# Altium PCB ADCS C2Sv0.1.PcbDoc (part 2 of 3)
Units mm, origin at the board's own origin, x right, y up, seen from the top; angles counter-clockwise.
Board outline 90 x 68 mm, 6 copper layers (SIG 1, GND 1, SIG 2, PWR, GND 2, SIG 3), stack 1.597 mm thick; 158 components, 104 nets, 588 pads, 339 vias.
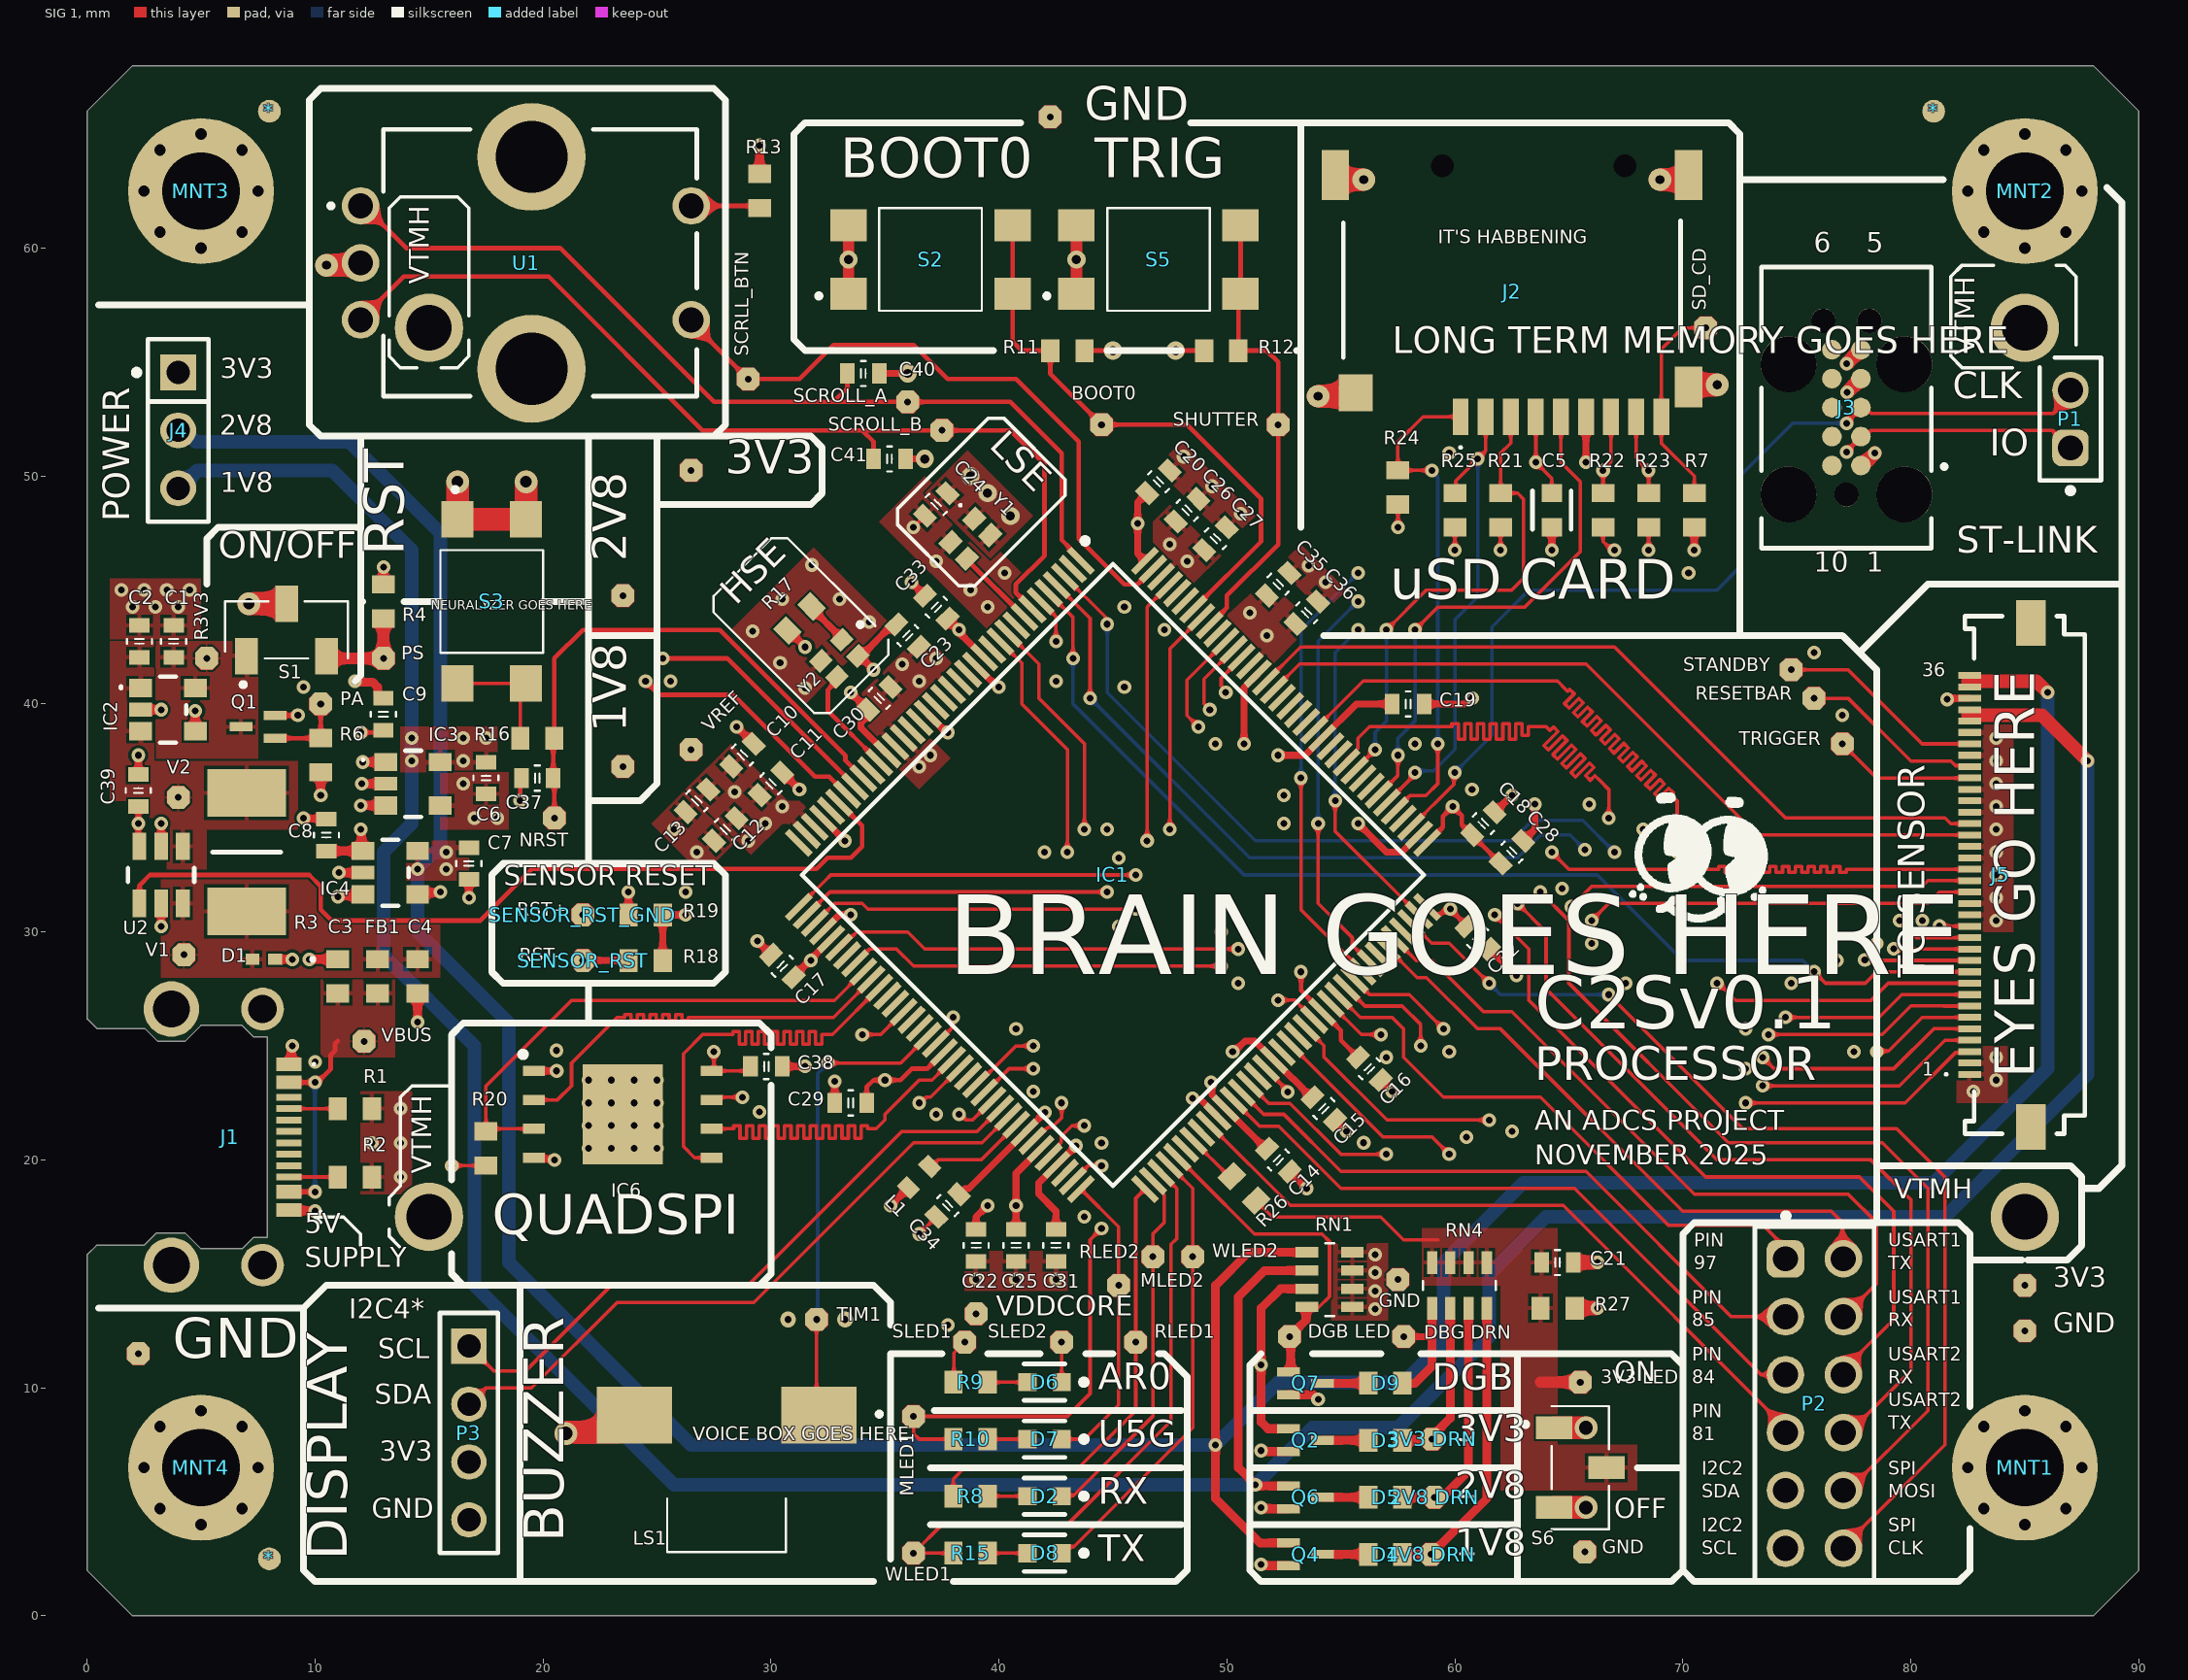
[diagram p0: SIG 1 view]

## Via types
v1: diameter 0.6, hole 0.3, SIG 1 to SIG 3, tented both sides, 317 vias
v2: diameter 0.8, hole 0.4, SIG 1 to SIG 3, tented both sides, 9 vias
v3: diameter 1, hole 0.4, SIG 1 to SIG 3, tented both sides, 5 vias
v4: diameter 1, hole 0.5, SIG 1 to SIG 3, tented both sides, 3 vias
v5: diameter 1, hole 0.6, SIG 1 to SIG 3, tented both sides, 3 vias
v6: diameter 0.7, hole 0.3, SIG 1 to SIG 3, tented both sides, 2 vias

## Nets (pads, with @x,y where several pads share a name; then routed paths per layer and width w, separated by ;. In a path a pad name is that pad's centre, name@x,y a point inside that pad or via, vN(x,y) a via of type N, cw(c..) or ccw(c..) an arc to the next point about the centre after c; other vN are vias at no path point) (continued)
3V3: (continued)
  SIG 1 w0.3: R17.1@30.72,43.22 30.78,43.22 v1(31.5,42.5) ; C17.1@30.995,27.995 C17.1@30.995,28.005 30.995,28.041 IC1.41@32.634,29.68 ; v1(33.5,40.5) 34.245,39.755 C30.1@34.255,39.755 34.26,39.75 34.26,39.51 33.951,39.201 33.951,38.953 34.694,38.21 IC1.25@35.109,37.795 ; Y2.4@33.813,42.106 Y2.4@33.894,42.106 ; v1(34.5,41.5) Y2.4@33.894,42.106 ; C23.2@35.495,43.505 35.354,43.505 33.955,42.106 Y2.4@33.894,42.106 ; C33.1@37.775,43.725 C33.1@37.75,43.75 v1(38.25,43.25) ; C33.1@37.884,43.505 37.901,43.505 38.156,43.25 v1(38.25,43.25) ; 38.495,18.745 38.67,18.745 IC1.65@41.119,21.195 v1(42.012,22.088) ; IC1.13@39.352,42.037 38.381,43.009 38.381,43.025 38.25,43.156 v1(38.25,43.25) ; C31.1@42.5,16.95 42.5,17.75 41.75,18.5 41.75,18.997 IC1.69@42.534,19.781 v1(43.377,20.623) ; IC1.144@46.406,46.28 46.086,46.6 v1(46.086,47.914) 46.086,48.836 C20.1@46.505,49.255 ; v1(49.3,23.4) 49.338,23.362 49.338,22.858 IC1.83@49.941,22.255 51.707,20.49 C14.1@51.76,20.49 ; v1(50.25,24.75) 50.331,24.75 50.798,25.216 51.223,25.216 IC1.89@52.063,24.377 52.876,23.563 52.908,23.563 53.246,23.225 53.246,23.194 53.694,22.745 C15.1@53.755,22.745 ; v1(52.25,37.75) 53.432,37.75 IC1.122@54.184,38.502 55.682,40 C19.1@57.25,40 ; v1(70.5,46.75) R7.1@70.5,47.75
  SIG 1 w0.381: C8.2@10.5,33.55 IC4.1@12.1,33.55 12.044,33.606 12.044,34.397 12,34.441 v1(12,34.5) ; v1(11,31.55) 11.042,31.592 12.042,31.592 IC4.3@12.1,31.65 ; v1(12,35.55) IC3.3@13.1,35.55 IC3.3@13.05,35.5 ; v1(12.1,37.45) IC3.1@13.1,37.45 ; R13.1@29.5,63.25 v1(29.5,64.5) ; Q2.1@52.7,8.2 51.8,8.2 51.5,8.5 v1(51.5,11) 51.5,13.5 52.35,14.35 RN1.5@53.5,14.35
  SIG 1 w0.5: S2.1@33.4,58 v2(33.4,59.5) S2.3@33.4,61 ; S5.1@43.4,58 v2(43.4,59.5) S5.3@43.4,61
  SIG 1 w0.6: J3.1@77.884,50.46 77.884,50.465 v1(78.419,51)
  SIG 1 w1: v4(7.1,44.4) S1.2@8.75,44.4 ; S6.1@64.35,8.25 v5(65.75,8.25)
  other v1: 31.75,28.75 51.75,43 51,44
  other v2: 40.5,48.25 39.5,49.25 38.75,50
"3V3 LED": "3V3 LED.TP" C21.2 R26.1 R27.2 RN4.1 RN4.2 RN4.3 RN4.4 S6.2 | length 10.4
  SIG 1 w0.152: R26.1@51.28,18.22 52,17.5 56.75,17.5 57.75,16.5 59.25,16.5
  SIG 1 w0.5: 63.75,10.25 65.5,10.25
3V3_DRAIN: "3V3 DRN.TP" D3.A RN4.6 | length 7.3
  SIG 1 w0.381: D3.A@57.7,7.7 58.825,7.7 59.8,8.675 RN4.6@59.8,13.5
81: IC1.81 P2.7 | length 31
  SIG 1 w0.152: IC1.81@49.234,21.548 52.782,18 54.247,18 64.75,18 74.5,8.25 P2.7@74.5,8.04
84: IC1.84 P2.5 | length 29.2
  SIG 1 w0.152: IC1.84@50.295,22.609 51.429,21.475 52.275,21.475 55,18.75 65.25,18.75 73.42,10.58 P2.5@74.5,10.58
85: IC1.85 P2.3 | length 27.9
  SIG 1 w0.152: IC1.85@50.648,22.963 51.611,22 52.5,22 55,19.5 65.75,19.5 72.13,13.12 P2.3@74.5,13.12
97: IC1.97 P2.1 | length 24.9
  SIG 1 w0.152: IC1.97@54.891,27.205 55.846,26.25 57.25,26.25 57.75,25.75 57.75,24.5 59.5,22.75 63.75,22.75 69.375,17.125 73.535,17.125 P2.1@74.46,16.2
BOOT0: BOOT0.TP IC1.138 R11.1 S2.2 S2.4 | length 25.5
  SIG 1 w0.2: S2.4@40.6,61 40.6,55.9 41,55.5 R11.1@42.25,55.5 42.25,54.5 BOOT0.TP@44.5,52.25 48.25,52.25 51.5,49 51.5,47.132 IC1.138@48.527,44.159
CSA_OUT: IC1.31 U2.1 | length 37.8
  SIG 1 w0.2: U2.1@2.3,31.25 2.3,32.05 2.75,32.5 9.75,32.5 10.25,32 10.25,30.978 10.728,30.5 17.25,30.5 19.515,32.765 32,32.765 32.492,33.258 33.508,33.258 34,33.75 34,34.661 IC1.31@32.988,35.673
DCMI_CLK: IC1.44 J5.17 | length 51.2
  SIG 1 w0.152: IC1.44@33.695,28.619 34.325,29.25 35.5,29.25 36.25,28.5 v1(49.75,28.5) ; v1(66,30.5) 66.75,31.25 80.75,31.25 81.249,31.749 J5.17@82.571,31.749
  SIG 2 w0.152: v1(49.75,28.5) 52,28.5 52.5,29 58,29 58.5,28.5 61.9,28.5 62.4,29 64.5,29 v1(66,30.5)
DCMI_D0: IC1.98 J5.3 | length 49.4
  SIG 1 w0.152: IC1.98@55.245,27.559 56.053,26.75 57.687,26.75 58.5,25.937 v1(58.5,25) ; v1(72.75,22.5) 79.75,22.5 81.953,24.703 82.528,24.703 J5.3@82.575,24.75
  SIG 2 w0.152: v1(58.5,25) 59.75,23.75 60,23.75 60.194,23.75 60.194,23.356 60.474,23.356 60.474,23.877 60.753,23.877 60.753,23.356 61.033,23.356 61.033,23.877 61.312,23.877 61.312,23.356 61.591,23.356 61.591,23.877 61.871,23.877 61.871,23.356 62.15,23.356 62.15,23.877 62.43,23.877 62.43,23.356 62.709,23.356 62.709,23.877 62.988,23.877 62.988,23.356 63.268,23.356 63.268,23.877 63.547,23.877 63.547,23.356 63.827,23.356 63.827,23.877 64.106,23.877 64.106,23.356 64.385,23.356 64.385,23.877 64.665,23.877 64.665,23.356 64.944,23.356 64.944,23.877 65.224,23.877 65.224,23.356 65.503,23.356 65.503,23.877 65.782,23.877 65.782,23.356 66.062,23.356 66.062,23.877 66.341,23.877 66.341,23.356 66.621,23.356 66.621,23.877 66.9,23.877 66.9,23.356 67.179,23.356 67.179,23.877 67.459,23.877 67.459,23.356 67.738,23.356 67.738,23.877 68.018,23.877 68.018,23.356 68.297,23.356 68.297,23.877 68.576,23.877 68.576,23.356 68.856,23.356 68.856,23.877 69.135,23.877 69.135,23.356 69.415,23.356 69.415,23.877 69.694,23.877 69.694,23.356 69.973,23.356 69.973,23.75 70.05,23.75 70.251,23.75 71.5,22.501 72.197,22.5 v1(72.75,22.5)
DCMI_D1: IC1.99 J5.4 | length 50.9
  SIG 1 w0.152: IC1.99@55.598,27.912 55.598,27.907 56.255,27.25 58,27.25 v1(59.5,25.75) ; v1(73.5,23.25) 79.5,23.25 81.5,25.25 J5.4@82.575,25.25
  SIG 2 w0.152: v1(59.5,25.75) 60.25,25.75 60.326,25.75 60.326,25.877 60.606,25.877 60.606,25.095 60.885,25.095 60.885,25.877 61.164,25.877 61.164,25.095 61.444,25.095 61.444,25.877 61.723,25.877 61.723,25.095 62.003,25.095 62.003,25.877 62.282,25.877 62.282,25.095 62.561,25.095 62.561,25.877 62.841,25.877 62.841,25.095 63.12,25.095 63.12,25.877 63.4,25.877 63.4,25.095 63.679,25.095 63.679,25.877 63.958,25.877 63.958,25.095 64.238,25.095 64.238,25.877 64.517,25.877 64.517,25.095 64.797,25.095 64.797,25.877 65.076,25.877 65.076,25.095 65.355,25.095 65.355,25.877 65.635,25.877 65.635,25.095 65.914,25.095 65.914,25.877 66.194,25.877 66.194,25.095 66.473,25.095 66.473,25.877 66.752,25.877 66.752,25.095 67.032,25.095 67.032,25.877 67.311,25.877 67.311,25.095 67.591,25.095 67.591,25.877 67.87,25.877 67.87,25.44 68.149,25.44 68.149,25.75 69.334,25.75 69.75,25.75 72.25,23.25 v1(73.5,23.25)
DCMI_D2: IC1.141 J5.5 | length 52.9
  SIG 1 w0.152: v1(46.5,34) 46.5,44.253 IC1.141@47.466,45.219 ; v1(73.5,24.5) 74,24 79.25,24 81,25.75 J5.5@82.575,25.75
  SIG 2 w0.152: v1(46.5,34) 47.25,33.25 63.25,33.25 64,32.5 65.5,32.5 71.75,26.25 71.75,25.75 72.5,25 73,25 v1(73.5,24.5)